# EAGLE board main_board_optimized (EAGLE 8.2.2)
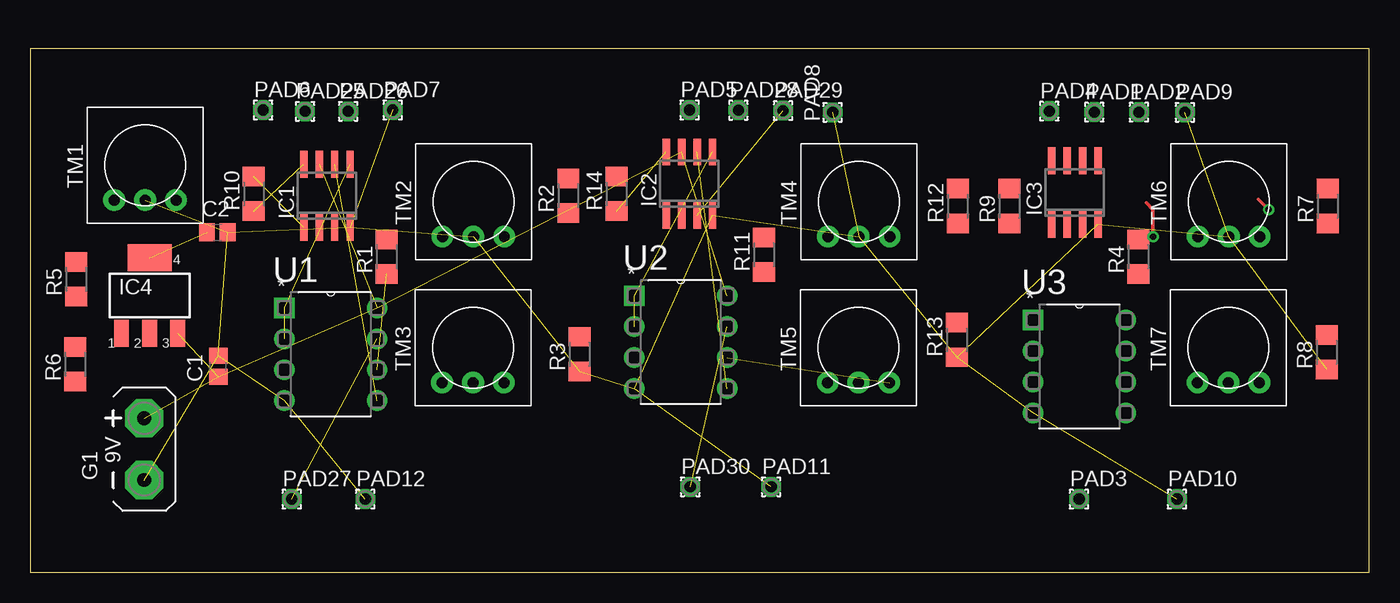
[diagram p0: board, top side]
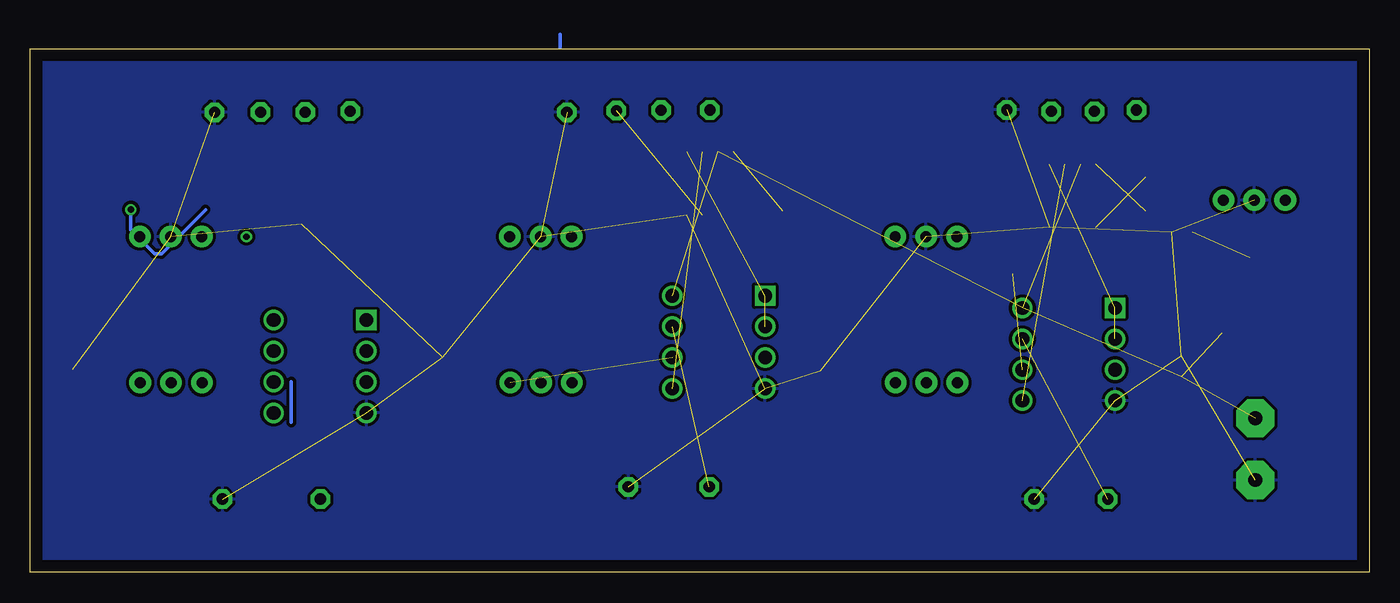
[diagram p1: board, bottom side, seen from below]

Size 110 x 43 mm. Coordinates in mm from the lower left corner, seen from the top.
Outline: 0,0 110,0 110,43 0,43 0,0
Copper layers (1*16): Top 0.035mm / dielectric 1.5mm / Bottom 0.035mm
Design rules "default": minimum track width 6mil, minimum drill 0.35mm, track to track 6mil, track to pad 6mil, pad to pad 6mil, via to via 6mil, smd to smd 6mil, copper to edge 40mil, drill to drill 6mil, minimum pad ring 10mil, minimum via ring 8mil, stop-mask expansion 4mil, vias tented up to drill 0mil, thermal gap 10mil
Net classes: 0 default: width 0.305 mm, drill 0.508 mm, clearance 0.254 mm

## Footprints (pad centres in the part's own frame; a part is rotated, then mirrored left to right if it is on the bottom)
C2012 = smd 1.3 x 1.5: 1 -0.85,0; 2 0.85,0
AB9V = drill 1.118 pad 3.15 octagon: + 0,2.54; - 0,-2.54
SOIC8 = smd 0.6 x 2.2: 1 -1.905,-2.6; 2 -0.635,-2.6; 3 0.635,-2.6; 4 1.905,-2.6; 5 1.905,2.6; 6 0.635,2.6; 7 -0.635,2.6; 8 -1.905,2.6
SOT223 = smd 1.219 x 2.235: 1 -2.311,-3.099; 2 0,-3.099; 3 2.311,-3.099 | smd 3.6 x 2.2: 4 0,3.099
1,6/0,9 = drill 0.914 pad 1.6 octagon: 1 0,0
R1206 = smd 1.6 x 1.803: 1 -1.422,0; 2 1.422,0
TRIM-3386 = drill 0.9 pad 1.778: 1 -2.54,-2.857; 2 0,-2.857; 3 2.54,-2.857
DIP254P762X508-8 = drill 1.118 square: 1 -7.62,7.62 | drill 1.118: 2 -7.62,5.08; 3 -7.62,2.54; 4 -7.62,0; 5 0,0; 6 0,2.54; 7 0,5.08; 8 0,7.62

## Placement (x,y rotation side)
C1  [C2012]  15.44,16.91 90 top
C2  [C2012]  15.36,27.91 0 top
G1  AB9V  [AB9V]  9.35,10.1 0 top
IC1  LT1168ACS8  [SOIC8]  24.37,30.91 0 top
IC2  LT1168ACS8  [SOIC8]  54.15,31.91 0 top
IC3  LT1168ACS8  [SOIC8]  85.82,31.18 0 top
IC4  317EMP  [SOT223]  9.79,22.72 0 top
PAD1  [1,6/0,9]  87.42,37.78 0 top
PAD2  [1,6/0,9]  91.09,37.78 0 top
PAD3  [1,6/0,9]  86.17,6 0 top
PAD4  [1,6/0,9]  83.72,37.86 0 top
PAD5  [1,6/0,9]  54.17,37.96 0 top
PAD6  [1,6/0,9]  19.12,37.96 0 top
PAD7  [1,6/0,9]  29.77,37.96 0 top
PAD8  [1,6/0,9]  65.92,37.77 90 top
PAD9  [1,6/0,9]  94.87,37.77 0 top
PAD10  [1,6/0,9]  94.22,6 0 top
PAD11  [1,6/0,9]  60.87,7 0 top
PAD12  [1,6/0,9]  27.52,6 0 top
PAD25  [1,6/0,9]  22.57,37.85 0 top
PAD26  [1,6/0,9]  26.12,37.85 0 top
PAD27  [1,6/0,9]  21.47,6 0 top
PAD28  [1,6/0,9]  58.18,37.94 0 top
PAD29  [1,6/0,9]  61.85,37.91 0 top
PAD30  [1,6/0,9]  54.22,7 0 top
R1  [R1206]  29.28,25.91 90 top
R2  [R1206]  44.2,30.91 90 top
R3  [R1206]  45.12,17.91 90 top
R4  [R1206]  91.04,25.91 90 top
R5  [R1206]  3.76,24.07 90 top
R6  [R1206]  3.68,17.07 90 top
R7  [R1206]  106.6,30.07 90 top
R8  [R1206]  106.52,18.07 90 top
R9  [R1206]  80.44,30.07 90 top
R10  [R1206]  18.36,31.07 90 top
R11  [R1206]  60.28,26.07 90 top
R12  [R1206]  76.2,30.07 90 top
R13  [R1206]  76.12,19.07 90 top
R14  [R1206]  48.15,31.07 90 top
TM1  [TRIM-3386]  9.43,33.42 0 top
TM2  [TRIM-3386]  36.4,30.42 0 top
TM3  [TRIM-3386]  36.37,18.42 0 top
TM4  [TRIM-3386]  68.07,30.42 0 top
TM5  [TRIM-3386]  68.04,18.42 0 top
TM6  [TRIM-3386]  98.47,30.42 0 top
TM7  [TRIM-3386]  98.44,18.42 0 top
U1  TLC272IP  [DIP254P762X508-8]  28.49,14.08 0 top
U2  TLC272IP  [DIP254P762X508-8]  57.25,15.08 0 top
U3  TLC272IP  [DIP254P762X508-8]  90.01,13.08 0 top

## Library data of the parts
C1 C2 = eagle-ltspice; SPICEMODEL: NONE; SPICEPREFIX: C
G1 = battery
IC1-IC3 = linear-technology; MPN: LT1168ACS8; OC_FARNELL: unknown; OC_NEWARK: 57M2316
IC4 = linear
PAD1-PAD12 PAD25-PAD30 = wirepad
R1-R14 TM1-TM7 = adafruit
U1-U3 = Texas Instruments_By_element14_Batch_1; MPN: TLC272IP; OC_FARNELL: 2386835; OC_NEWARK: 08F9090; PACKAGE: PDIP; SUPPLIER: Texas Instruments

## Nets
GND: C1.2 C2.2 G1.- IC1.4 IC2.4 IC3.4 PAD7.1 PAD8.1 PAD9.1 PAD10.1 PAD11.1 PAD12.1 R3.1 R8.1 R13.1 TM1.2 TM2.2 TM4.2 TM6.2 U1.4 U2.4 U3.4
N$1: PAD27.1 U1.7
N$2: R1.1 U1.6
N$4: IC1.5 U1.1 U1.2
N$7: PAD3.1
N$8: TM7.3
N$10: R6.1
N$11: TM6.1
N$12: IC3.1
N$13: TM7.2
N$14: IC3.8
N$15: U3.5
N$16: IC1.1 R10.2
N$18: PAD1.1
N$19: IC1.8 R10.1
N$20: IC1.6 U1.5
N$21: IC1.3
N$22: IC1.2
N$23: PAD30.1 U2.7
N$24: TM5.3 U2.6
N$26: IC2.5 U2.1 U2.2
N$27: TM5.2
N$28: IC2.1
N$29: IC2.8 R14.1
N$30: IC2.6 U2.5
N$31: IC2.3 PAD29.1
N$33: TM1.1
N$36: PAD2.1
N$37: U1.3
N$44: U3.6
N$46: R6.2
N$47: IC4.1
N$49: R2.2
N$50: R7.2
N$54: PAD4.1
N$57: R7.1
N$59: U3.3
N$62: R8.2
N$64: R9.2
N$73: R1.2
N$75: R2.1
N$77: R3.2
N$86: U2.3
N$89: R14.2
N$90: IC2.2
VCC: C1.1 G1.+ IC1.7 IC2.7 IC4.3 U1.8 U2.8
VDD: C2.1 IC4.4

## Tracks (layer width: path | path; a pad name or v marks a point on that pad's centre or on a via)
GND  (21 unrouted)
  pour Bottom: -4,46 -8,46 -8,-8 125,-8 125,-5 125,51 -4,51
  pour Bottom: -9,48 -11,48 -11,-7 132,-7 132,-6 125,-6 125,50 -9,50
N$1  (1 unrouted)
N$2  (1 unrouted)
N$4  (2 unrouted)
N$16  (1 unrouted)
N$19  (1 unrouted)
N$20  (1 unrouted)
N$23  (1 unrouted)
N$24  (1 unrouted)
N$26  (2 unrouted)
N$29  (1 unrouted)
N$30  (1 unrouted)
N$31  (1 unrouted)
N$82  (via drill 0.51)
  Top 0.305: v101.75,29.78 100.91,30.62
  Bottom 0.305: v101.75,29.78 101.75,28.1 99.79,26.15 99.23,26.15 95.6,29.78
N$84
  Bottom 0.305: 66.48,44.19 66.48,43.07
N$87  (via drill 0.51)
  Top 0.305: 91.69,30.34 92.25,29.78 v92.25,27.54
N$91
  Bottom 0.305: 88.57,15.65 88.57,12.29
VCC  (6 unrouted)
VDD  (1 unrouted)